# Altium PCB bmsSlavePCB.PcbDoc (part 1 of 2)
Units mil, origin at the board's own origin, x right, y up, seen from the top; angles counter-clockwise.
Board outline 13750 x 2750 mil, 2 copper layers (Top Layer, Bottom Layer); 264 components, 181 nets, 623 pads, 9 vias.
Unrouted connection lines stored in the file: 225.
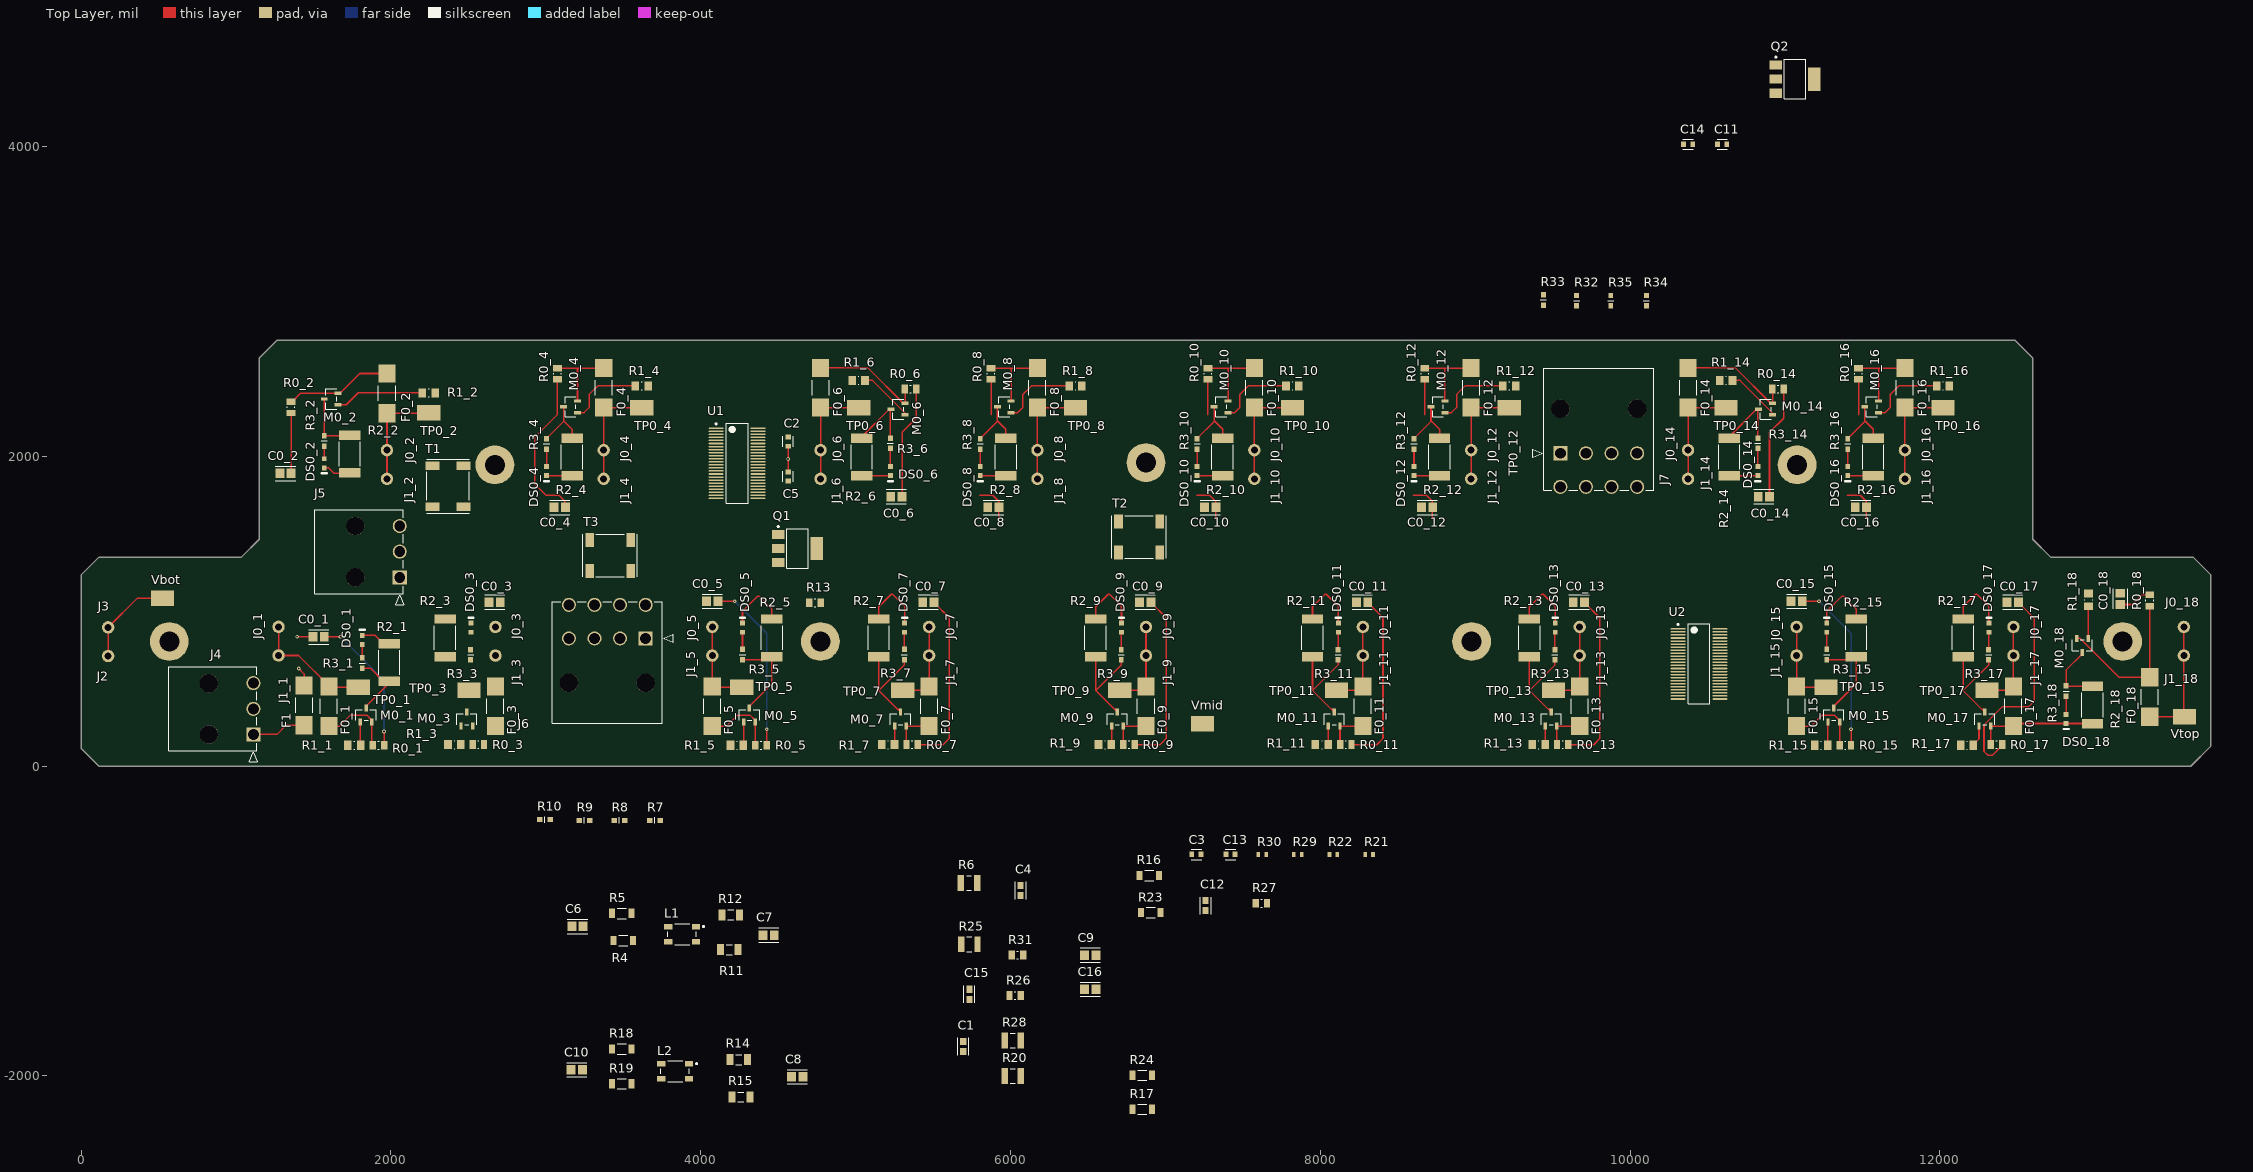
[diagram p0: Top Layer view]
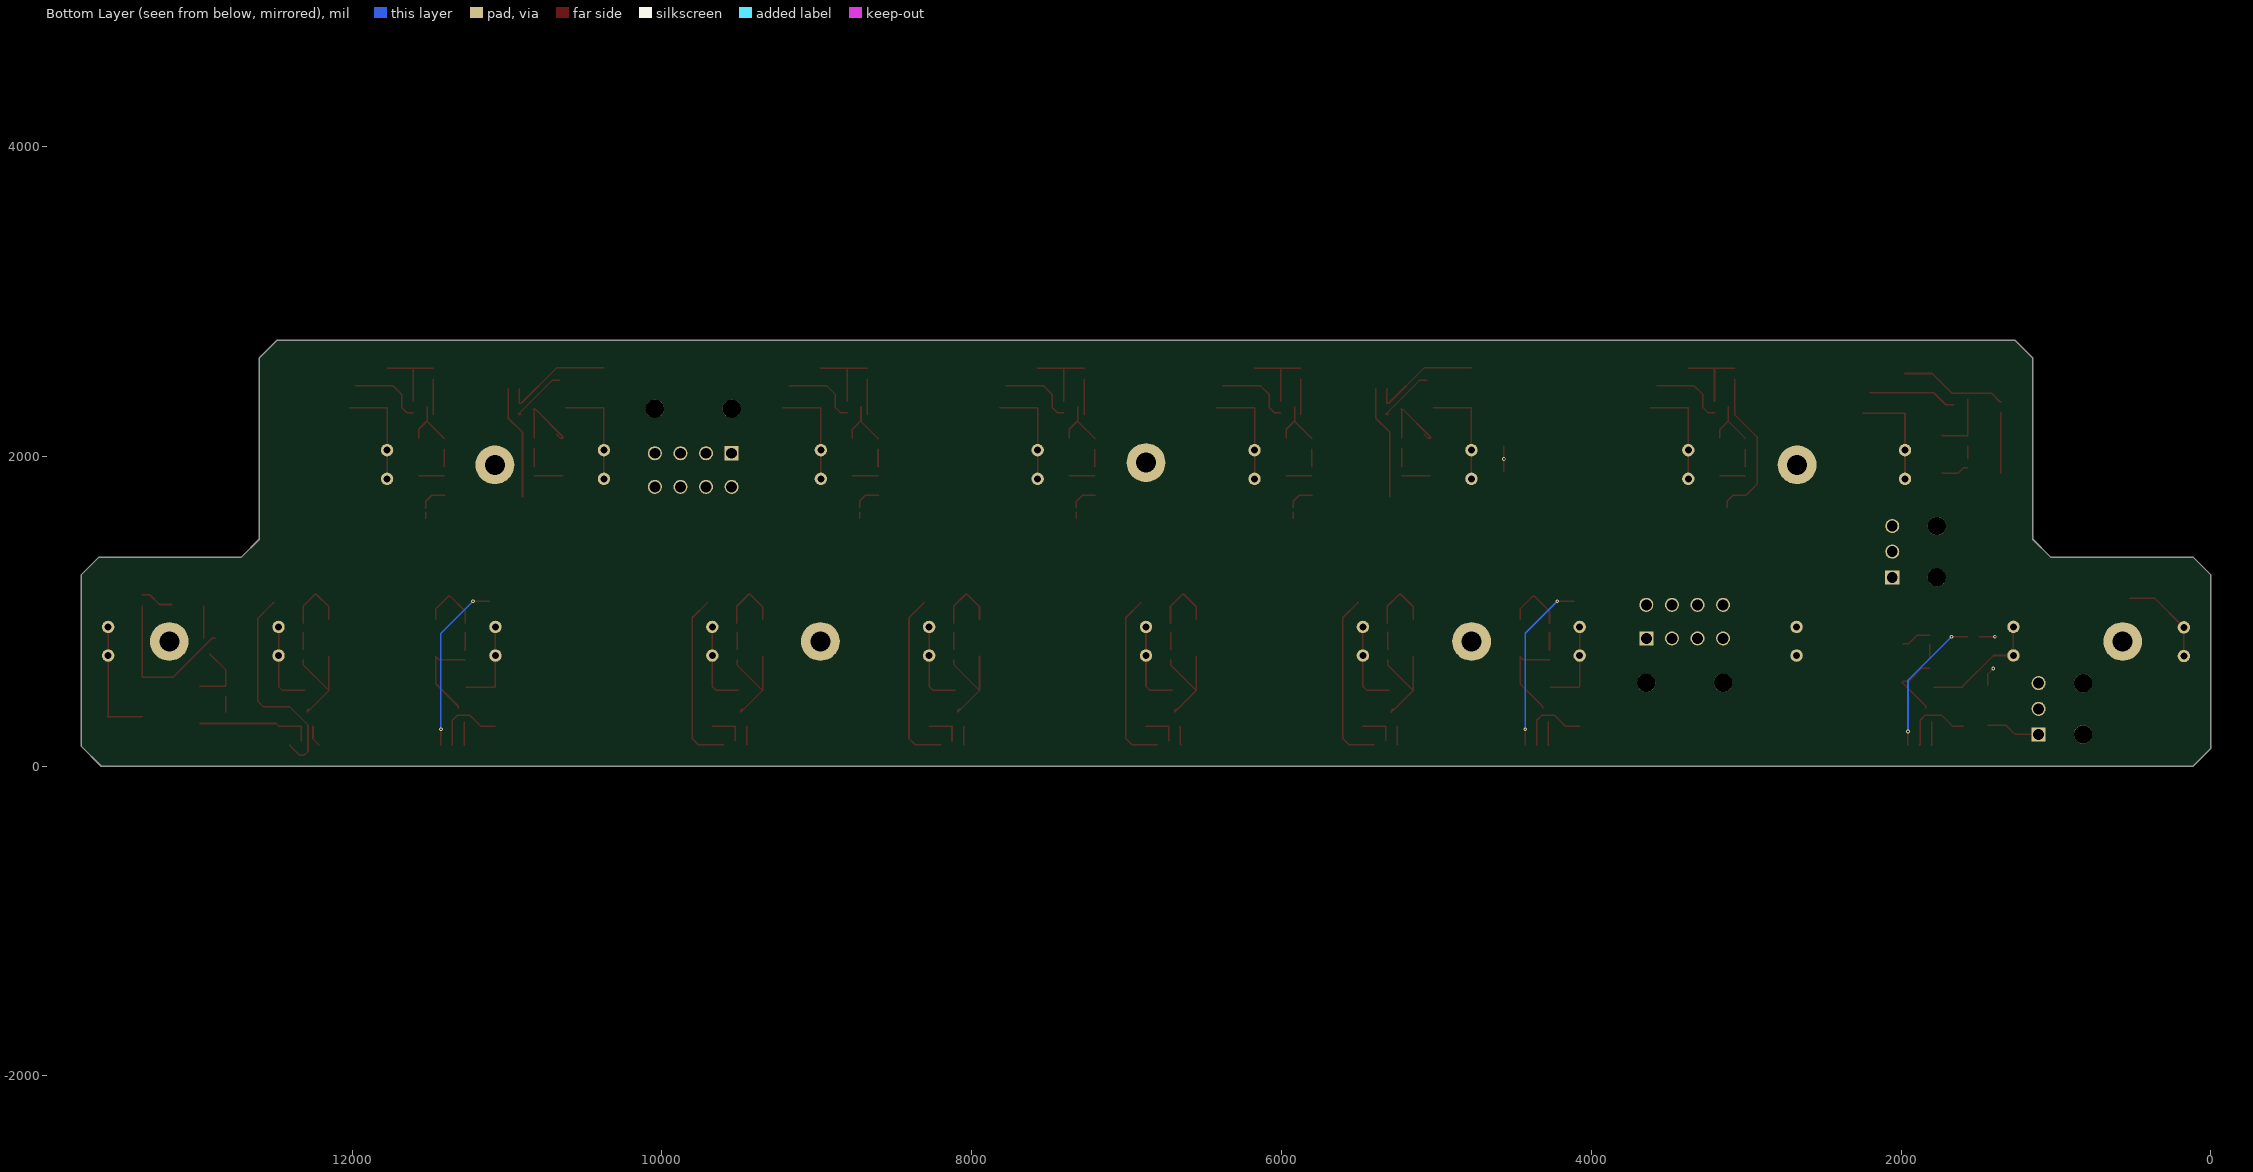
[diagram p1: Bottom Layer view, seen from below]

## Layer stack, top to bottom
Top Solder: solder mask 0.4, Solder Resist, Dk 3.5
Top Layer: signal copper 1.4
Dielectric 1: dielectric 12.6, FR-4, Dk 4.8
Bottom Layer: signal copper 1.4
Bottom Solder: solder mask 0.4, Solder Resist, Dk 3.5

## Board outline
115,0 0,115 0,1235 115,1350 1035,1350 1150,1465 1150,2635 1265,2750 12485,2750 12600,2635 12600,1465 12715,1350 13635,1350 13750,1235 13750,130 13620,0

## Design rules (kind name [scope] priority, off if disabled: settings)
Clearance [All] p1: gap=5 ignorepadtopadclearanceinfootprint=TRUE
HoleSize [All] p1: absolutevalues=TRUE maxlimit=150 minlimit=1 maxpercent=80.000 minpercent=20.000
MinimumSolderMaskSliver [All] p1: minsoldermaskwidth=1.8
PolygonConnect [All] p1: connectstyle=Relief reliefconductorwidth=10 reliefentries=4 polygonreliefangle="90 Angle" airgapwidth=10
RoomDefinition U_BalCircuit7 [InComponentClass('U_BalCircuit7')] p1: confinementstyle=ConfineIn formatcopy=TRUE lockcomponents=FALSE outline 5765,1605 6520,1605 6520,2645 5765,2645
RoomDefinition U_BalCircuit5 [InComponentClass('U_BalCircuit5')] p2: confinementstyle=ConfineIn formatcopy=TRUE lockcomponents=FALSE outline 4685,1675 5435,1675 5435,2645 4685,2645
RoomDefinition U_BalCircuit3 [InComponentClass('U_BalCircuit3')] p3: confinementstyle=ConfineIn formatcopy=TRUE lockcomponents=FALSE outline 2905,1605 3720,1605 3720,2645 2905,2645
RoomDefinition U_BalCircuit0 [InComponentClass('U_BalCircuit0')] p4: confinementstyle=ConfineIn formatcopy=TRUE lockcomponents=FALSE outline 1185,70 2095,70 2095,990 1185,990
RoomDefinition U_BalCircuit4 [InComponentClass('U_BalCircuit4')] p5: confinementstyle=ConfineIn formatcopy=TRUE lockcomponents=FALSE outline 3970,70 4565,70 4565,1140 3970,1140
RoomDefinition U_BalCircuit6 [InComponentClass('U_BalCircuit6')] p6: confinementstyle=ConfineIn formatcopy=TRUE lockcomponents=FALSE outline 4895,43.91 5660,43.91 5660,1233.91 4895,1233.91
RoomDefinition U_BalCircuit10 [InComponentClass('U_BalCircuit10')] p7: confinementstyle=ConfineIn formatcopy=TRUE lockcomponents=FALSE outline 7695,43.91 8460,43.91 8460,1233.91 7695,1233.91
RoomDefinition U_BalCircuit12 [InComponentClass('U_BalCircuit12')] p8: confinementstyle=ConfineIn formatcopy=TRUE lockcomponents=FALSE outline 9095,43.91 9860,43.91 9860,1233.91 9095,1233.91
RoomDefinition U_BalCircuit14 [InComponentClass('U_BalCircuit14')] p9: confinementstyle=ConfineIn formatcopy=TRUE lockcomponents=FALSE outline 10970,70 11565,70 11565,1140 10970,1140
RoomDefinition U_BalCircuit8 [InComponentClass('U_BalCircuit8')] p10: confinementstyle=ConfineIn formatcopy=TRUE lockcomponents=FALSE outline 6295,43.91 7060,43.91 7060,1233.91 6295,1233.91
RoomDefinition U_BalCircuit2 [InComponentClass('U_BalCircuit2')] p11: confinementstyle=ConfineIn formatcopy=TRUE lockcomponents=FALSE outline 2230,43.91 2860,43.91 2860,1233.91 2230,1233.91
RoomDefinition U_BalCircuit15 [InComponentClass('U_BalCircuit15')] p12: confinementstyle=ConfineIn formatcopy=TRUE lockcomponents=FALSE outline 11365,1605 12120,1605 12120,2645 11365,2645
RoomDefinition U_BalCircuit16 [InComponentClass('U_BalCircuit16')] p13: confinementstyle=ConfineIn formatcopy=TRUE lockcomponents=FALSE outline 11895,43.91 12660,43.91 12660,1233.91 11895,1233.91
RoomDefinition U_BalCircuit13 [InComponentClass('U_BalCircuit13')] p14: confinementstyle=ConfineIn formatcopy=TRUE lockcomponents=FALSE outline 10285,1675 11035,1675 11035,2645 10285,2645
RoomDefinition U_BalCircuit11 [InComponentClass('U_BalCircuit11')] p15: confinementstyle=ConfineIn formatcopy=TRUE lockcomponents=FALSE outline 8565,1605 9320,1605 9320,2645 8565,2645
RoomDefinition U_BalCircuit9 [InComponentClass('U_BalCircuit9')] p16: confinementstyle=ConfineIn formatcopy=TRUE lockcomponents=FALSE outline 7165,1605 7920,1605 7920,2645 7165,2645
RoomDefinition U_BalCircuit1 [InComponentClass('U_BalCircuit1')] p17: confinementstyle=ConfineIn formatcopy=TRUE lockcomponents=FALSE outline 1220,1765 2345,1765 2345,2610 1220,2610
RoomDefinition U_BalCircuit17 [InComponentClass('U_BalCircuit17')] p18: confinementstyle=ConfineIn formatcopy=TRUE lockcomponents=FALSE outline 12775,205 13675,205 13675,1185 12775,1185
RoutingVias [All] p1: holewidth=28 width=50 viastyle="Through Hole" minholewidth=28 minwidth=50 maxholewidth=28 maxwidth=50
SilkToSilkClearance [All] p1: silktosilkclearance=0
SilkToSolderMaskClearance [IsPad] p1: minsilkscreentomaskgap=0 clearancetoexposedcopper=TRUE
SolderMaskExpansion [All] p1: expansion=4 istentingtop=FALSE
Width [All] p1: maxlimit=10 minlimit=10 preferedwidth=10
26 further rules are at their usual default settings.

## Classes and differential pairs
component class U_BalCircuit17: C0_18 DS0_18 F0_18 J0_18 J1_18 M0_18 R0_18 R1_18 R2_18 R3_18 Vtop
component class U_BalCircuit16: C0_17 DS0_17 F0_17 J0_17 J1_17 M0_17 R0_17 R1_17 R2_17 R3_17 TP0_17
component class U_BalCircuit15: C0_16 DS0_16 F0_16 J0_16 J1_16 M0_16 R0_16 R1_16 R2_16 R3_16 TP0_16
component class U_BalCircuit14: C0_15 DS0_15 F0_15 J0_15 J1_15 M0_15 R0_15 R1_15 R2_15 R3_15 TP0_15
component class U_BalCircuit13: C0_14 DS0_14 F0_14 J0_14 J1_14 M0_14 R0_14 R1_14 R2_14 R3_14 TP0_14
component class U_BalCircuit12: C0_13 DS0_13 F0_13 J0_13 J1_13 M0_13 R0_13 R1_13 R2_13 R3_13 TP0_13
component class U_BalCircuit11: C0_12 DS0_12 F0_12 J0_12 J1_12 M0_12 R0_12 R1_12 R2_12 R3_12 TP0_12
component class U_BalCircuit10: C0_11 DS0_11 F0_11 J0_11 J1_11 M0_11 R0_11 R1_11 R2_11 R3_11 TP0_11
component class U_BalCircuit9: C0_10 DS0_10 F0_10 J0_10 J1_10 M0_10 R0_10 R1_10 R2_10 R3_10 TP0_10
component class U_BalCircuit8: C0_9 DS0_9 F0_9 J0_9 J1_9 M0_9 R0_9 R1_9 R2_9 R3_9 TP0_9
component class U_BalCircuit7: C0_8 DS0_8 F0_8 J0_8 J1_8 M0_8 R0_8 R1_8 R2_8 R3_8 TP0_8
component class U_BalCircuit6: C0_7 DS0_7 F0_7 J0_7 J1_7 M0_7 R0_7 R1_7 R2_7 R3_7 TP0_7
component class U_BalCircuit5: C0_6 DS0_6 F0_6 J0_6 J1_6 M0_6 R0_6 R1_6 R2_6 R3_6 TP0_6
component class U_BalCircuit4: C0_5 DS0_5 F0_5 J0_5 J1_5 M0_5 R0_5 R1_5 R2_5 R3_5 TP0_5
component class U_BalCircuit3: C0_4 DS0_4 F0_4 J0_4 J1_4 M0_4 R0_4 R1_4 R2_4 R3_4 TP0_4
component class U_BalCircuit2: C0_3 DS0_3 F0_3 J0_3 J1_3 M0_3 R0_3 R1_3 R2_3 R3_3 TP0_3
component class U_BalCircuit1: C0_2 DS0_2 F0_2 J0_2 J1_2 M0_2 R0_2 R1_2 R2_2 R3_2 TP0_2
component class U_BalCircuit0: C0_1 DS0_1 F0_1 J0_1 J1_1 M0_1 R0_1 R1_1 R2_1 R3_1 TP0_1
channel class BalCircuit: U_BalCircuit0 U_BalCircuit1 U_BalCircuit2 U_BalCircuit3 U_BalCircuit4 U_BalCircuit5 U_BalCircuit6 U_BalCircuit7 U_BalCircuit8 U_BalCircuit9 U_BalCircuit10 U_BalCircuit11 U_BalCircuit12 U_BalCircuit13 U_BalCircuit14 U_BalCircuit15 U_BalCircuit16 U_BalCircuit17

## Components (designator, comment, footprint, x,y, rotation, side; value= is the part's Value field where it differs from the comment)
C0_1 "CL21B103KCANNNC" FP-CL21-IPC_A 1533.55,835 r180 top (schematic designator C0)
C0_2 "CL21B103KCANNNC" FP-CL21-IPC_A 1320,1890 r180 top (schematic designator C0)
C0_3 "CL21B103KCANNNC" FP-CL21-IPC_A 2670,1058.91 r180 top (schematic designator C0)
C0_4 "CL21B103KCANNNC" FP-CL21-IPC_A 3090,1670 r180 top (schematic designator C0)
C0_5 "CL21B103KCANNNC" FP-CL21-IPC_A 4075,1065 r180 top (schematic designator C0)
C0_6 "CL21B103KCANNNC" FP-CL21-IPC_A 5263.55,1740 r180 top (schematic designator C0)
C0_7 "CL21B103KCANNNC" FP-CL21-IPC_A 5470,1058.91 r180 top (schematic designator C0)
C0_8 "CL21B103KCANNNC" FP-CL21-IPC_A 5890,1670 r180 top (schematic designator C0)
C0_9 "CL21B103KCANNNC" FP-CL21-IPC_A 6870,1058.91 r180 top (schematic designator C0)
C0_10 "CL21B103KCANNNC" FP-CL21-IPC_A 7290,1670 r180 top (schematic designator C0)
C0_11 "CL21B103KCANNNC" FP-CL21-IPC_A 8270,1058.91 r180 top (schematic designator C0)
C0_12 "CL21B103KCANNNC" FP-CL21-IPC_A 8690,1670 r180 top (schematic designator C0)
C0_13 "CL21B103KCANNNC" FP-CL21-IPC_A 9670,1058.91 r180 top (schematic designator C0)
C0_14 "CL21B103KCANNNC" FP-CL21-IPC_A 10863.55,1740 r180 top (schematic designator C0)
C0_15 "CL21B103KCANNNC" FP-CL21-IPC_A 11075,1065 r180 top (schematic designator C0)
C0_16 "CL21B103KCANNNC" FP-CL21-IPC_A 11490,1670 r180 top (schematic designator C0)
C0_17 "CL21B103KCANNNC" FP-CL21-IPC_A 12470,1058.91 r180 top (schematic designator C0)
C0_18 "CL21B103KCANNNC" FP-CL21-IPC_A 13165,1080 r90 top (schematic designator C0)
C1 "CL10B104KC8NNNC" FP-CL10-IPC_A 5695,-1810 r90 top
C2 "CC0603KRX7R9BB105" FP-CC0603-DB-MFG 4565,2095 r270 top
C3 "CC0603KRX7R9BB105" FP-CC0603-DB-MFG 7200,-570 r180 top
C4 "CL10B104KC8NNNC" FP-CL10-IPC_A 6065,-802.56 r90 top
C5 "CC0603KRX7R9BB105" FP-CC0603-DB-MFG 4565,1870 r90 top
C6 "CL21B103KCANNNC" FP-CL21-IPC_A 3205,-1035 r180 top
C7 "CL21B103KCANNNC" FP-CL21-IPC_A 4438.55,-1090 r0 top
C8 "CL21B103KCANNNC" FP-CL21-IPC_A 4623.55,-2005 r180 top
C9 "CL21B103KCANNNC" FP-CL21-IPC_A 6515,-1220 r180 top
C10 "CL21B103KCANNNC" FP-CL21-IPC_A 3200,-1960 r0 top
C11 "CC0603KRX7R9BB105" FP-CC0603-DB-MFG 10595,4015 r0 top
C12 "CL10B104KC8NNNC" FP-CL10-IPC_A 7260,-900 r90 top
C13 "CC0603KRX7R9BB105" FP-CC0603-DB-MFG 7420,-570 r180 top
C14 "CC0603KRX7R9BB105" FP-CC0603-DB-MFG 10375,4015 r0 top
C15 "CL10B104KC8NNNC" FP-CL10-IPC_A 5735,-1472.56 r90 top
C16 "CL21B103KCANNNC" FP-CL21-IPC_A 6515,-1440 r180 top
DS0_1 "19-217/R6C-AL1M2VY/3T" EVRL-0603-2_V 1815,815 r90 top (schematic designator DS0)
DS0_2 "19-217/R6C-AL1M2VY/3T" EVRL-0603-2_V 1570,1955 r270 top (schematic designator DS0)
DS0_3 "19-217/R6C-AL1M2VY/3T" EVRL-0603-2_V 2516.97,893.91 r90 top (schematic designator DS0)
DS0_4 "19-217/R6C-AL1M2VY/3T" EVRL-0603-2_V 3005,1905 r270 top (schematic designator DS0)
DS0_5 "19-217/R6C-AL1M2VY/3T" EVRL-0603-2_V 4270,893.91 r90 top (schematic designator DS0)
DS0_6 "19-217/R6C-AL1M2VY/3T" EVRL-0603-2_V 5225,1905 r270 top (schematic designator DS0)
DS0_7 "19-217/R6C-AL1M2VY/3T" EVRL-0603-2_V 5316.97,893.91 r90 top (schematic designator DS0)
DS0_8 "19-217/R6C-AL1M2VY/3T" EVRL-0603-2_V 5805,1905 r270 top (schematic designator DS0)
DS0_9 "19-217/R6C-AL1M2VY/3T" EVRL-0603-2_V 6716.97,893.91 r90 top (schematic designator DS0)
DS0_10 "19-217/R6C-AL1M2VY/3T" EVRL-0603-2_V 7205,1905 r270 top (schematic designator DS0)
DS0_11 "19-217/R6C-AL1M2VY/3T" EVRL-0603-2_V 8116.97,893.91 r90 top (schematic designator DS0)
DS0_12 "19-217/R6C-AL1M2VY/3T" EVRL-0603-2_V 8605,1905 r270 top (schematic designator DS0)
DS0_13 "19-217/R6C-AL1M2VY/3T" EVRL-0603-2_V 9516.97,893.91 r90 top (schematic designator DS0)
DS0_14 "19-217/R6C-AL1M2VY/3T" EVRL-0603-2_V 10825,1905 r270 top (schematic designator DS0)
DS0_15 "19-217/R6C-AL1M2VY/3T" EVRL-0603-2_V 11270,893.91 r90 top (schematic designator DS0)
DS0_16 "19-217/R6C-AL1M2VY/3T" EVRL-0603-2_V 11405,1905 r270 top (schematic designator DS0)
DS0_17 "19-217/R6C-AL1M2VY/3T" EVRL-0603-2_V 12316.97,893.91 r90 top (schematic designator DS0)
DS0_18 "19-217/R6C-AL1M2VY/3T" EVRL-0603-2_V 12815,305 r270 top (schematic designator DS0)
F0_1 "3404.0112.11" OMT125 1600,388.83 r90 top (schematic designator F0)
F0_2 "3404.0112.11" OMT125 1975,2405 r270 top (schematic designator F0)
F0_3 "3404.0112.11" OMT125 2675,388.83 r90 top (schematic designator F0)
F0_4 "3404.0112.11" OMT125 3374.29,2440.98 r270 top (schematic designator F0)
F0_5 "3404.0112.11" OMT125 4075,388.83 r90 top (schematic designator F0)
F0_6 "3404.0112.11" OMT125 4774.29,2440.98 r270 top (schematic designator F0)
F0_7 "3404.0112.11" OMT125 5475,388.83 r90 top (schematic designator F0)
F0_8 "3404.0112.11" OMT125 6174.29,2440.98 r270 top (schematic designator F0)
F0_9 "3404.0112.11" OMT125 6875,388.83 r90 top (schematic designator F0)
F0_10 "3404.0112.11" OMT125 7574.29,2440.98 r270 top (schematic designator F0)
F0_11 "3404.0112.11" OMT125 8275,388.83 r90 top (schematic designator F0)
F0_12 "3404.0112.11" OMT125 8974.29,2440.98 r270 top (schematic designator F0)
F0_13 "3404.0112.11" OMT125 9675,388.83 r90 top (schematic designator F0)
F0_14 "3404.0112.11" OMT125 10374.29,2440.98 r270 top (schematic designator F0)
F0_15 "3404.0112.11" OMT125 11075,388.83 r90 top (schematic designator F0)
F0_16 "3404.0112.11" OMT125 11774.29,2440.98 r270 top (schematic designator F0)
F0_17 "3404.0112.11" OMT125 12475,388.83 r90 top (schematic designator F0)
F0_18 "3404.0112.11" OMT125 13355,445 r270 top (schematic designator F0)
F1 "3404.0112.11" OMT125 1440,395 r90 top
J0_1 "Pogo Pin" 0856-0 1275,899.53 r270 top locked (schematic designator J0)
J0_2 "Pogo Pin" 0856-0 1975,2040 r180 top (schematic designator J0)
J0_3 "Pogo Pin" 0856-0 2675,898.91 r270 top (schematic designator J0)
J0_4 "Pogo Pin" 0856-0 3374.29,2040 r180 top (schematic designator J0)
J0_5 "Pogo Pin" 0856-0 4075,898.91 r270 top (schematic designator J0)
J0_6 "Pogo Pin" 0856-0 4774.29,2040 r180 top (schematic designator J0)
J0_7 "Pogo Pin" 0856-0 5475,898.91 r270 top (schematic designator J0)
J0_8 "Pogo Pin" 0856-0 6174.29,2040 r180 top (schematic designator J0)
J0_9 "Pogo Pin" 0856-0 6875,898.91 r270 top (schematic designator J0)
J0_10 "Pogo Pin" 0856-0 7574.29,2040 r180 top (schematic designator J0)
J0_11 "Pogo Pin" 0856-0 8275,898.91 r270 top (schematic designator J0)
J0_12 "Pogo Pin" 0856-0 8974.29,2040 r180 top (schematic designator J0)
J0_13 "Pogo Pin" 0856-0 9675,898.91 r270 top (schematic designator J0)
J0_14 "Pogo Pin" 0856-0 10374.29,2040 r180 top (schematic designator J0)
J0_15 "Pogo Pin" 0856-0 11075,898.91 r270 top (schematic designator J0)
J0_16 "Pogo Pin" 0856-0 11774.29,2040 r180 top (schematic designator J0)
J0_17 "Pogo Pin" 0856-0 12475,898.91 r270 top (schematic designator J0)
J0_18 "Pogo Pin" 0856-0 13575,898.91 r180 top (schematic designator J0)
J1_1 "Pogo Pin" 0856-0 1275,714.53 r270 top locked (schematic designator J1)
J1_2 "Pogo Pin" 0856-0 1975,1855 r180 top (schematic designator J1)
J1_3 "Pogo Pin" 0856-0 2675,713.91 r270 top (schematic designator J1)
J1_4 "Pogo Pin" 0856-0 3374.29,1855 r180 top (schematic designator J1)
J1_5 "Pogo Pin" 0856-0 4075,713.91 r270 top (schematic designator J1)
J1_6 "Pogo Pin" 0856-0 4774.29,1855 r180 top (schematic designator J1)
J1_7 "Pogo Pin" 0856-0 5475,713.91 r270 top (schematic designator J1)
J1_8 "Pogo Pin" 0856-0 6174.29,1855 r180 top (schematic designator J1)
J1_9 "Pogo Pin" 0856-0 6875,713.91 r270 top (schematic designator J1)
J1_10 "Pogo Pin" 0856-0 7574.29,1855 r180 top (schematic designator J1)
J1_11 "Pogo Pin" 0856-0 8275,713.91 r270 top (schematic designator J1)
J1_12 "Pogo Pin" 0856-0 8974.29,1855 r180 top (schematic designator J1)
J1_13 "Pogo Pin" 0856-0 9675,713.91 r270 top (schematic designator J1)
J1_14 "Pogo Pin" 0856-0 10374.29,1855 r180 top (schematic designator J1)
J1_15 "Pogo Pin" 0856-0 11075,713.91 r270 top (schematic designator J1)
J1_16 "Pogo Pin" 0856-0 11774.29,1855 r180 top (schematic designator J1)
J1_17 "Pogo Pin" 0856-0 12475,713.91 r270 top (schematic designator J1)
J1_18 "Pogo Pin" 0856-0 13575,713.91 r180 top (schematic designator J1)
J2 "Pogo Pin" 0856-0 175,711.09 r0 top
J3 "Pogo Pin" 0856-0 175,896.09 r0 top
J4 "1726480103" CON_1726480103 1112.4,205 r270 top
J5 "1726480103" CON_1726480103 2057.4,1219.29 r270 top
J6 "26013144" CON_26013144 3645.35,825 r0 top
J7 "26013144" CON_26013144 9549.65,2020 r180 top
L1 "DLW43SH101XK2L" FP-DLW43-0_2-t2_6-e0_6-MFG 3880,-1085 r180 top
L2 "DLW43SH101XK2L" FP-DLW43-0_2-t2_6-e0_6-MFG 3835,-1970 r180 top
M0_1 "SI2301CDS-T1-E3" SOT23_527AG_ONS 1840,330 r0 top (schematic designator M0)
M0_2 "SI2301CDS-T1-E3" SOT23_527AG_ONS 1615,2370 r90 top (schematic designator M0)
M0_3 "SI2301CDS-T1-E3" SOT23_527AG_ONS 2490,303.91 r0 top (schematic designator M0)
M0_4 "SI2301CDS-T1-E3" SOT23_527AG_ONS 3160,2320 r90 top (schematic designator M0)
M0_5 "SI2301CDS-T1-E3" SOT23_527AG_ONS 4315,330 r0 top (schematic designator M0)
M0_6 "SI2301CDS-T1-E3" SOT23_527AG_ONS 5275,2305 r90 top (schematic designator M0)
M0_7 "SI2301CDS-T1-E3" SOT23_527AG_ONS 5290,303.91 r0 top (schematic designator M0)
M0_8 "SI2301CDS-T1-E3" SOT23_527AG_ONS 5960,2320 r90 top (schematic designator M0)
M0_9 "SI2301CDS-T1-E3" SOT23_527AG_ONS 6690,303.91 r0 top (schematic designator M0)
M0_10 "SI2301CDS-T1-E3" SOT23_527AG_ONS 7360,2320 r90 top (schematic designator M0)
M0_11 "SI2301CDS-T1-E3" SOT23_527AG_ONS 8090,303.91 r0 top (schematic designator M0)
M0_12 "SI2301CDS-T1-E3" SOT23_527AG_ONS 8760,2320 r90 top (schematic designator M0)
M0_13 "SI2301CDS-T1-E3" SOT23_527AG_ONS 9490,303.91 r0 top (schematic designator M0)
M0_14 "SI2301CDS-T1-E3" SOT23_527AG_ONS 10875,2305 r90 top (schematic designator M0)
M0_15 "SI2301CDS-T1-E3" SOT23_527AG_ONS 11315,330 r0 top (schematic designator M0)
M0_16 "SI2301CDS-T1-E3" SOT23_527AG_ONS 11560,2320 r90 top (schematic designator M0)
M0_17 "SI2301CDS-T1-E3" SOT23_527AG_ONS 12290,303.91 r0 top (schematic designator M0)
M0_18 "SI2301CDS-T1-E3" SOT23_527AG_ONS 12920,780 r180 top (schematic designator M0)
Q1 "NSS1C201MZ4T3G" ONSC-SOT-223-4-318E-04_V 4625,1405 r0 top
Q2 "NSS1C201MZ4T3G" ONSC-SOT-223-4-318E-04_V 11065,4435 r0 top
R0_1 "RK73B2ATTD101J" RESC2013X60X30NL20T20 1920,135 r180 top (schematic designator R0)
R0_2 "RK73B2ATTD101J" RESC2013X60X30NL20T20 1355,2316.42 r90 top (schematic designator R0)
R0_3 "RK73B2ATTD101J" RESC2013X60X30NL20T20 2565,138.91 r180 top (schematic designator R0)
R0_4 "RK73B2ATTD101J" RESC2013X60X30NL20T20 3075,2533.58 r90 top (schematic designator R0)
R0_5 "RK73B2ATTD101J" RESC2013X60X30NL20T20 4390,135 r180 top (schematic designator R0)
R0_6 "RK73B2ATTD101J" RESC2013X60X30NL20T20 5355,2435 r180 top (schematic designator R0)
R0_7 "RK73B2ATTD101J" RESC2013X60X30NL20T20 5365,138.91 r180 top (schematic designator R0)
R0_8 "RK73B2ATTD101J" RESC2013X60X30NL20T20 5875,2533.58 r90 top (schematic designator R0)
R0_9 "RK73B2ATTD101J" RESC2013X60X30NL20T20 6765,138.91 r180 top (schematic designator R0)
R0_10 "RK73B2ATTD101J" RESC2013X60X30NL20T20 7275,2533.58 r90 top (schematic designator R0)
R0_11 "RK73B2ATTD101J" RESC2013X60X30NL20T20 8165,138.91 r180 top (schematic designator R0)
R0_12 "RK73B2ATTD101J" RESC2013X60X30NL20T20 8675,2533.58 r90 top (schematic designator R0)
R0_13 "RK73B2ATTD101J" RESC2013X60X30NL20T20 9565,138.91 r180 top (schematic designator R0)
R0_14 "RK73B2ATTD101J" RESC2013X60X30NL20T20 10955,2435 r180 top (schematic designator R0)
R0_15 "RK73B2ATTD101J" RESC2013X60X30NL20T20 11390,135 r180 top (schematic designator R0)
R0_16 "RK73B2ATTD101J" RESC2013X60X30NL20T20 11475,2533.58 r90 top (schematic designator R0)
R0_17 "RK73B2ATTD101J" RESC2013X60X30NL20T20 12365,138.91 r180 top (schematic designator R0)
R0_18 "RK73B2ATTD101J" RESC2013X60X30NL20T20 13355,1070 r270 top (schematic designator R0)
R1_1 "RC0805JR-073K3L" RESC0805(2012)_M 1763.66,135 r0 top value="3300.00 Ohm" (schematic designator R1)
R1_2 "RC0805JR-073K3L" RESC0805(2012)_M 2245,2410 r180 top value="3300.00 Ohm" (schematic designator R1)
R1_3 "RC0805JR-073K3L" RESC0805(2012)_M 2410,138.91 r0 top value="3300.00 Ohm" (schematic designator R1)
R1_4 "RC0805JR-073K3L" RESC0805(2012)_M 3620,2455 r180 top value="3300.00 Ohm" (schematic designator R1)
R1_5 "RC0805JR-073K3L" RESC0805(2012)_M 4233.66,135 r0 top value="3300.00 Ohm" (schematic designator R1)
R1_6 "RC0805JR-073K3L" RESC0805(2012)_M 5020,2490 r0 top value="3300.00 Ohm" (schematic designator R1)
R1_7 "RC0805JR-073K3L" RESC0805(2012)_M 5210,138.91 r0 top value="3300.00 Ohm" (schematic designator R1)
R1_8 "RC0805JR-073K3L" RESC0805(2012)_M 6420,2455 r180 top value="3300.00 Ohm" (schematic designator R1)
R1_9 "RC0805JR-073K3L" RESC0805(2012)_M 6610,138.91 r0 top value="3300.00 Ohm" (schematic designator R1)
R1_10 "RC0805JR-073K3L" RESC0805(2012)_M 7820,2455 r180 top value="3300.00 Ohm" (schematic designator R1)
R1_11 "RC0805JR-073K3L" RESC0805(2012)_M 8010,138.91 r0 top value="3300.00 Ohm" (schematic designator R1)
R1_12 "RC0805JR-073K3L" RESC0805(2012)_M 9220,2455 r180 top value="3300.00 Ohm" (schematic designator R1)
R1_13 "RC0805JR-073K3L" RESC0805(2012)_M 9410,138.91 r0 top value="3300.00 Ohm" (schematic designator R1)
R1_14 "RC0805JR-073K3L" RESC0805(2012)_M 10620,2490 r0 top value="3300.00 Ohm" (schematic designator R1)
R1_15 "RC0805JR-073K3L" RESC0805(2012)_M 11233.66,135 r0 top value="3300.00 Ohm" (schematic designator R1)
R1_16 "RC0805JR-073K3L" RESC0805(2012)_M 12020,2455 r180 top value="3300.00 Ohm" (schematic designator R1)
R1_17 "RC0805JR-073K3L" RESC0805(2012)_M 12175,135 r0 top value="3300.00 Ohm" (schematic designator R1)
R1_18 "RC0805JR-073K3L" RESC0805(2012)_M 12960,1073.66 r270 top value="3300.00 Ohm" (schematic designator R1)
R2_1 "352116RFT" FP-ERJ1TR-IPC_A 1990,670 r270 top (schematic designator R2)
R2_2 "352116RFT" FP-ERJ1TR-IPC_A 1735,2015 r90 top (schematic designator R2)
R2_3 "352116RFT" FP-ERJ1TR-IPC_A 2350,828.91 r270 top (schematic designator R2)
R2_4 "352116RFT" FP-ERJ1TR-IPC_A 3170,1995 r90 top (schematic designator R2)
R2_5 "352116RFT" FP-ERJ1TR-IPC_A 4460,828.91 r270 top (schematic designator R2)
R2_6 "352116RFT" FP-ERJ1TR-IPC_A 5040,1995 r90 top (schematic designator R2)
R2_7 "352116RFT" FP-ERJ1TR-IPC_A 5150,828.91 r270 top (schematic designator R2)
R2_8 "352116RFT" FP-ERJ1TR-IPC_A 5970,1995 r90 top (schematic designator R2)
R2_9 "352116RFT" FP-ERJ1TR-IPC_A 6550,828.91 r270 top (schematic designator R2)
R2_10 "352116RFT" FP-ERJ1TR-IPC_A 7370,1995 r90 top (schematic designator R2)
R2_11 "352116RFT" FP-ERJ1TR-IPC_A 7950,828.91 r270 top (schematic designator R2)
R2_12 "352116RFT" FP-ERJ1TR-IPC_A 8770,1995 r90 top (schematic designator R2)
R2_13 "352116RFT" FP-ERJ1TR-IPC_A 9350,828.91 r270 top (schematic designator R2)
R2_14 "352116RFT" FP-ERJ1TR-IPC_A 10640,1995 r90 top (schematic designator R2)
R2_15 "352116RFT" FP-ERJ1TR-IPC_A 11460,828.91 r270 top (schematic designator R2)
R2_16 "352116RFT" FP-ERJ1TR-IPC_A 11570,1995 r90 top (schematic designator R2)
R2_17 "352116RFT" FP-ERJ1TR-IPC_A 12150,828.91 r270 top (schematic designator R2)
R2_18 "352116RFT" FP-ERJ1TR-IPC_A 12985,395 r90 top (schematic designator R2)
R3_1 "0603WAF750JT5E" FP-AC0603-0_55-MFG 1815,665 r90 top (schematic designator R3)
R3_2 "0603WAF750JT5E" FP-AC0603-0_55-MFG 1570,2100 r270 top (schematic designator R3)
R3_3 "0603WAF750JT5E" FP-AC0603-0_55-MFG 2515,718.91 r90 top (schematic designator R3)
R3_4 "0603WAF750JT5E" FP-AC0603-0_55-MFG 3005,2080 r270 top (schematic designator R3)
R3_5 "0603WAF750JT5E" FP-AC0603-0_55-MFG 4270,720 r90 top (schematic designator R3)
R3_6 "0603WAF750JT5E" FP-AC0603-0_55-MFG 5225,2085 r270 top (schematic designator R3)
R3_7 "0603WAF750JT5E" FP-AC0603-0_55-MFG 5315,720 r90 top (schematic designator R3)
R3_8 "0603WAF750JT5E" FP-AC0603-0_55-MFG 5805,2080 r270 top (schematic designator R3)
R3_9 "0603WAF750JT5E" FP-AC0603-0_55-MFG 6715,718.91 r90 top (schematic designator R3)
R3_10 "0603WAF750JT5E" FP-AC0603-0_55-MFG 7205,2080 r270 top (schematic designator R3)
R3_11 "0603WAF750JT5E" FP-AC0603-0_55-MFG 8115,718.91 r90 top (schematic designator R3)
R3_12 "0603WAF750JT5E" FP-AC0603-0_55-MFG 8605,2080 r270 top (schematic designator R3)
R3_13 "0603WAF750JT5E" FP-AC0603-0_55-MFG 9515,718.91 r90 top (schematic designator R3)
R3_14 "0603WAF750JT5E" FP-AC0603-0_55-MFG 10825,2085 r270 top (schematic designator R3)
R3_15 "0603WAF750JT5E" FP-AC0603-0_55-MFG 11270,720 r90 top (schematic designator R3)
R3_16 "0603WAF750JT5E" FP-AC0603-0_55-MFG 11405,2080 r270 top (schematic designator R3)
R3_17 "0603WAF750JT5E" FP-AC0603-0_55-MFG 12315,718.91 r90 top (schematic designator R3)
R3_18 "0603WAF750JT5E" FP-AC0603-0_55-MFG 12815,485 r270 top (schematic designator R3)
R4 "RC1206FR-07300RL" FP-RC1206-MFG 3500,-1125 r0 top
R5 "RC1206FR-07300RL" FP-RC1206-MFG 3490,-950 r180 top
R6 "ERJ-14YJ101U" RESC3225X70X50LL20T20 5732.17,-755 r180 top
R7 "ERJ-PB3B1002V" FP-AC0603-0_55-MFG 3705,-350 r180 top
R8 "ERJ-PB3B1002V" FP-AC0603-0_55-MFG 3475,-350 r180 top
R9 "ERJ-PB3B1002V" FP-AC0603-0_55-MFG 3250,-350 r180 top
R10 "ERJ-PB3B1002V" FP-AC0603-0_55-MFG 2995,-345 r180 top
R11 "RC1206FR-0762RL" RESC1206(3216)_N 4185,-1185 r180 top value="62.00 Ohm"
R12 "RC1206FR-0762RL" RESC1206(3216)_N 4195,-960 r180 top value="62.00 Ohm"
R13 "RK73B2ATTD101J" RESC2013X60X30NL20T20 4738.58,1055 r180 top
R14 "RC1206FR-0762RL" RESC1206(3216)_N 4245,-1895 r180 top value="62.00 Ohm"
R15 "RC1206FR-0762RL" RESC1206(3216)_N 4260,-2135 r0 top value="62.00 Ohm"
R16 "AC1206FR-0749R9L" FP-AC1206-MFG 6895,-705 r180 top value=49.9Ω
R17 "AC1206FR-0749R9L" FP-AC1206-MFG 6850,-2215 r180 top value=49.9Ω
R18 "RC1206FR-07300RL" FP-RC1206-MFG 3490,-1825 r0 top
R19 "RC1206FR-07300RL" FP-RC1206-MFG 3490,-2050 r180 top
R20 "ERJ-14YJ101U" RESC3225X70X50LL20T20 6015,-2000 r180 top
R21 "RC0603FR-071K21L" RESC1608X55X25LL10T15 8315,-570 r180 top
R22 "RC0603FR-07806RL" RESC1608X55X25LL10T15 8085,-570 r180 top
R23 "AC1206FR-0749R9L" FP-AC1206-MFG 6905,-945 r180 top value=49.9Ω
R24 "AC1206FR-0749R9L" FP-AC1206-MFG 6850,-1995 r180 top value=49.9Ω
R25 "ERJ-14YJ101U" RESC3225X70X50LL20T20 5735,-1150 r180 top
R26 "RK73B2ATTD101J" RESC2013X60X30NL20T20 6030,-1480 r180 top
R27 "RK73B2ATTD101J" RESC2013X60X30NL20T20 7620,-885 r180 top
R28 "ERJ-14YJ101U" RESC3225X70X50LL20T20 6015,-1770 r180 top
R29 "RC0603FR-071K21L" RESC1608X55X25LL10T15 7855,-570 r180 top
R30 "RC0603FR-07806RL" RESC1608X55X25LL10T15 7625,-570 r180 top
R31 "RK73B2ATTD101J" RESC2013X60X30NL20T20 6045,-1220 r180 top
R32 "ERJ-PB3B1002V" FP-AC0603-0_55-MFG 9655,3005 r270 top
R33 "ERJ-PB3B1002V" FP-AC0603-0_55-MFG 9440,3010 r270 top
R34 "ERJ-PB3B1002V" FP-AC0603-0_55-MFG 10105,3005 r270 top
R35 "ERJ-PB3B1002V" FP-AC0603-0_55-MFG 9875,3005 r270 top
T1 "PE-68386NLT" PE-68386NL_PUL 2370,1807.5 r90 top
T2 "PE-68386NLT" PE-68386NL_PUL 6830,1480 r0 top
T3 "PE-68386NLT" PE-68386NL_PUL 3415,1360 r180 top
TP0_1 "N/A" "PCB Test Point" 1790,510 r180 top (schematic designator TP0)
TP0_2 "N/A" "PCB Test Point" 2245,2280 r180 top (schematic designator TP0)
TP0_3 "N/A" "PCB Test Point" 2505,488.91 r180 top (schematic designator TP0)
TP0_4 "N/A" "PCB Test Point" 3620,2315 r180 top (schematic designator TP0)
TP0_5 "N/A" "PCB Test Point" 4265,510 r180 top (schematic designator TP0)
TP0_6 "N/A" "PCB Test Point" 5020,2315 r180 top (schematic designator TP0)
TP0_7 "N/A" "PCB Test Point" 5305,488.91 r180 top (schematic designator TP0)
TP0_8 "N/A" "PCB Test Point" 6420,2315 r180 top (schematic designator TP0)
TP0_9 "N/A" "PCB Test Point" 6705,488.91 r180 top (schematic designator TP0)
TP0_10 "N/A" "PCB Test Point" 7820,2315 r180 top (schematic designator TP0)
TP0_11 "N/A" "PCB Test Point" 8105,488.91 r180 top (schematic designator TP0)
TP0_12 "N/A" "PCB Test Point" 9220,2315 r180 top (schematic designator TP0)
TP0_13 "N/A" "PCB Test Point" 9505,488.91 r180 top (schematic designator TP0)
TP0_14 "N/A" "PCB Test Point" 10620,2315 r180 top (schematic designator TP0)
TP0_15 "N/A" "PCB Test Point" 11265,510 r180 top (schematic designator TP0)
TP0_16 "N/A" "PCB Test Point" 12020,2315 r180 top (schematic designator TP0)
TP0_17 "N/A" "PCB Test Point" 12305,488.91 r180 top (schematic designator TP0)
U1 "LTC6804HG-1#TRPBF" LT-G-48_M 4235,1955 r0 top
U2 "LTC6804HG-1#TRPBF" LT-G-48_M 10445,660 r0 top
Vbot "N/A" "PCB Test Point" 525,1085 r0 top (schematic designator TP1)
Vmid "N/A" "PCB Test Point" 7240,275 r0 top (schematic designator TP2)
Vtop "N/A" "PCB Test Point" 13580,320 r180 top (schematic designator TP0)

## Footprints (in the part's own frame and the unit in brackets; to place one, negate y for a bottom-side part, rotate by r counter-clockwise, add the part's x,y. Pads: shape width x height; smd on the part's side, far side on the other; paste and mask are expansions set on the pad)
0856-0 [mil]
  round 80 hole 45: 0(0,0)
  body extent -77,-77 77,77, height 110
CON_26013144 [mm]
  rect 2.3x2.3 hole 1.8 mask+0.076: 1(0,0)
  round 2.3 hole 1.8 mask+0.076: 2(-4.2,0) 3(-8.4,0) 4(-12.6,0) 5(0,5.5) 6(-4.2,5.5) 7(-8.4,5.5) 8(-12.6,5.5)
  round 3 hole 3 unplated mask+0.076: M1(0,-7.3) M2(-12.6,-7.3)
  silkscreen extent -15.3,-13.9 4.48,6.03, body extent -15.32,-13.9 3.08,6.03, height 11.4
CON_1726480103 [mm]
  rect 2.3x2.3 hole 1.8 mask+0.076: 1(0,0)
  round 2.3 hole 1.8 mask+0.076: 2(-4.2,0) 3(-8.4,0)
  round 3 hole 3 unplated mask+0.076: M1(0,-7.3) M2(-8.4,-7.3)
  silkscreen extent -11.1,-13.9 4.48,0.64, body extent -11.11,-13.53 2.69,0.52, height 7.2
EVRL-0603-2_V [mm] "SMD, 2-Leads, Body 1.6x0.8mm"
  rect 0.8x0.8 smd: 1(-0.75,0) 2(0.75,0)
  silkscreen extent 1.65,-0.4 1.65,0.4, body extent -0.8,-0.4 0.8,0.4, height 0.5
FP-AC0603-0_55-MFG [mm]
  rect 0.9x0.8 smd paste+0 mask+0: 1(-0.85,0) 2(0.85,0)
  silkscreen extent 0,-0.5 0,0.5, body extent -1.4,-0.55 1.4,0.55, height 0.25
FP-AC1206-MFG [mm]
  rect 1x1.5 smd paste+0 mask+0: 1(-1.6,0) 2(1.6,0)
  silkscreen extent -0.73,-0.85 0.73,0.85, body extent -2.2,-0.95 2.2,0.95, height 0.25
FP-CC0603-DB-MFG [mm]
  rect 0.8x0.9 smd paste+0 mask+0: 1(-0.75,0) 2(0.75,0)
  silkscreen extent -0.85,-0.85 0.85,0.85, body extent -1.43,-0.82 1.43,0.82, height 0.25
FP-CL10-IPC_A [mil]
  rect 45.6x39.85 smd paste+0 mask+0: 1(-32.56,0) 2(32.56,0)
  silkscreen extent -55,-36 55,36, body extent -75,-40 75,40, height 10
FP-CL21-IPC_A [mil]
  rect 57.27x61.27 smd paste+0 mask+0: 1(-36.45,0) 2(36.45,0)
  silkscreen extent -65,-46 65,46, body extent -85,-50 85,50, height 10
FP-DLW43-0_2-t2_6-e0_6-MFG [mm]
  rect 1.35x0.9 smd paste+0 mask+0: 1(-2.275,-1.25) 2(2.275,-1.25) 3(2.275,1.25) 4(-2.275,1.25)
  silkscreen extent -3.65,-1.7 2.35,1.7, body extent -3.05,-1.8 3.05,1.8, height 0.25
FP-ERJ1TR-IPC_A [mil]
  rect 61.22x138.04 smd paste+0 mask+0: 1(-121.09,0) 2(121.09,0)
  silkscreen extent -79,-69 79,69, body extent -171,-89 171,89, height 10
FP-RC1206-MFG [mm]
  rect 1x1.5 smd paste+0 mask+0: 1(-1.6,0) 2(1.6,0)
  silkscreen extent -0.73,-0.85 0.73,0.85, body extent -2.2,-0.95 2.2,0.95, height 0.25
LT-G-48_M [mm] "SOP, 48-Leads, Body 13.1x5.6mm, Pitch 0.5mm, IPC Low Density"
  oval 2.45x0.25 smd: 1(-3.425,5.75) 2(-3.425,5.25) 3(-3.425,4.75) 4(-3.425,4.25) 5(-3.425,3.75) 6(-3.425,3.25) 7(-3.425,2.75) 8(-3.425,2.25) 9(-3.425,1.75) 10(-3.425,1.25) 11(-3.425,0.75) 12(-3.425,0.25) 13(-3.425,-0.25) 14(-3.425,-0.75) 15(-3.425,-1.25) 16(-3.425,-1.75) 17(-3.425,-2.25) 18(-3.425,-2.75) 19(-3.425,-3.25) 20(-3.425,-3.75) 21(-3.425,-4.25) 22(-3.425,-4.75) 23(-3.425,-5.25) 24(-3.425,-5.75) 25(3.425,-5.75) 26(3.425,-5.25) 27(3.425,-4.75) 28(3.425,-4.25) 29(3.425,-3.75) 30(3.425,-3.25) 31(3.425,-2.75) 32(3.425,-2.25) 33(3.425,-1.75) 34(3.425,-1.25) 35(3.425,-0.75) 36(3.425,-0.25) 37(3.425,0.25) 38(3.425,0.75) 39(3.425,1.25) 40(3.425,1.75) 41(3.425,2.25) 42(3.425,2.75) 43(3.425,3.25) 44(3.425,3.75) 45(3.425,4.25) 46(3.425,4.75) 47(3.425,5.25) 48(3.425,5.75)
  silkscreen extent -3.55,-6.55 1.8,6.6, body extent -2.8,-6.55 2.8,6.55, height 2
OMT125 [mm] "Chip Resistor, 2-Leads, Body 3.20x1.60mm, IPC Medium Density"
  rect 3x2.8 smd: 1(-3.3,0) 2(3.2,0)
  silkscreen extent -1.3,-1.4 1.2,1.4
ONSC-SOT-223-4-318E-04_V [mm] "SOT223, 4-Leads, Body 6.5x3.5mm, Pitch 2.3mm"
  rect 2x1.5 smd: 1(-3.15,2.3) 2(-3.15,0) 3(-3.15,-2.3)
  rect 2x3.8 smd: 4(3.15,0)
  silkscreen extent -3.27,-3.25 1.75,3.72, body extent -1.75,-3.25 1.75,3.25, height 1.75
"PCB Test Point" [mil] "Board Mouted Test Point"
  rect 150x100 smd: 1(0,0)
PE-68386NL_PUL [mil]
  rect 55x90 smd paste-27.5 mask+0: 1(-132.5,100) 2(-132.5,-100) 3(132.5,-100) 4(132.5,100)
  silkscreen extent -175,-138 175,138, body extent 0,0 10,10, height 10
RESC0805(2012)_M [mm] "Chip Resistor, Body 2.0x1.3mm, IPC Low Density"
  rect 1.25x1.5 smd: 1(-1.05,0) 2(1.05,0)
  silkscreen extent -0.05,-0.65 0.05,0.65, body extent -1.1,-0.67 1.1,0.67, height 0.7
RESC1206(3216)_N [mm] "Chip Resistor, Body 3.2x1.6mm, IPC Medium Density"
  rect 1.15x1.8 smd: 1(-1.45,0) 2(1.45,0)
  silkscreen extent -0.5,-0.8 0.5,0.8, body extent -1.67,-0.87 1.67,0.87, height 0.75
RESC1608X55X25LL10T15 [mm] "Chip Resistor, 2-Leads, Body 1.60x0.80mm, IPC High Density"
  rect 0.6x0.8 smd: 1(-0.65,0) 2(0.65,0)
  body extent -0.85,-0.45 0.85,0.45, height 0.55
RESC2013X60X30NL20T20 [mm] "Chip Resistor, 2-Leads, Body 2.00x1.25mm, IPC Medium Density"
  rect 1.05x1.45 smd: 1(-0.925,0) 2(0.925,0)
  silkscreen extent -0.1,-0.62 0.1,0.63, body extent -1.1,-0.72 1.1,0.72, height 0.6
RESC3225X70X50LL20T20 [mm] "Chip Resistor, 2-Leads, Body 3.20x2.50mm, IPC High Density"
  rect 1.05x2.6 smd: 1(-1.325,0) 2(1.325,0)
  silkscreen extent -0.4,-1.2 0.4,1.2, body extent -1.7,-1.35 1.7,1.35, height 0.7
SOT23_527AG_ONS [mil]
  rect 22x45 smd paste+0 mask+0: 1(-37.4,-45) 2(37.4,-45) 3(0,45)
  silkscreen extent -65,-35 65,35, body extent -60,-30 60,30, height 30